# Altium PCB STM8_remote.PcbDoc
Units mil, origin at the board's own origin, x right, y up, seen from the top; angles counter-clockwise.
Board outline 1966 x 1954 mil, 2 copper layers (Top Layer, Bottom Layer); 54 components, 52 nets, 170 pads, 53 vias.
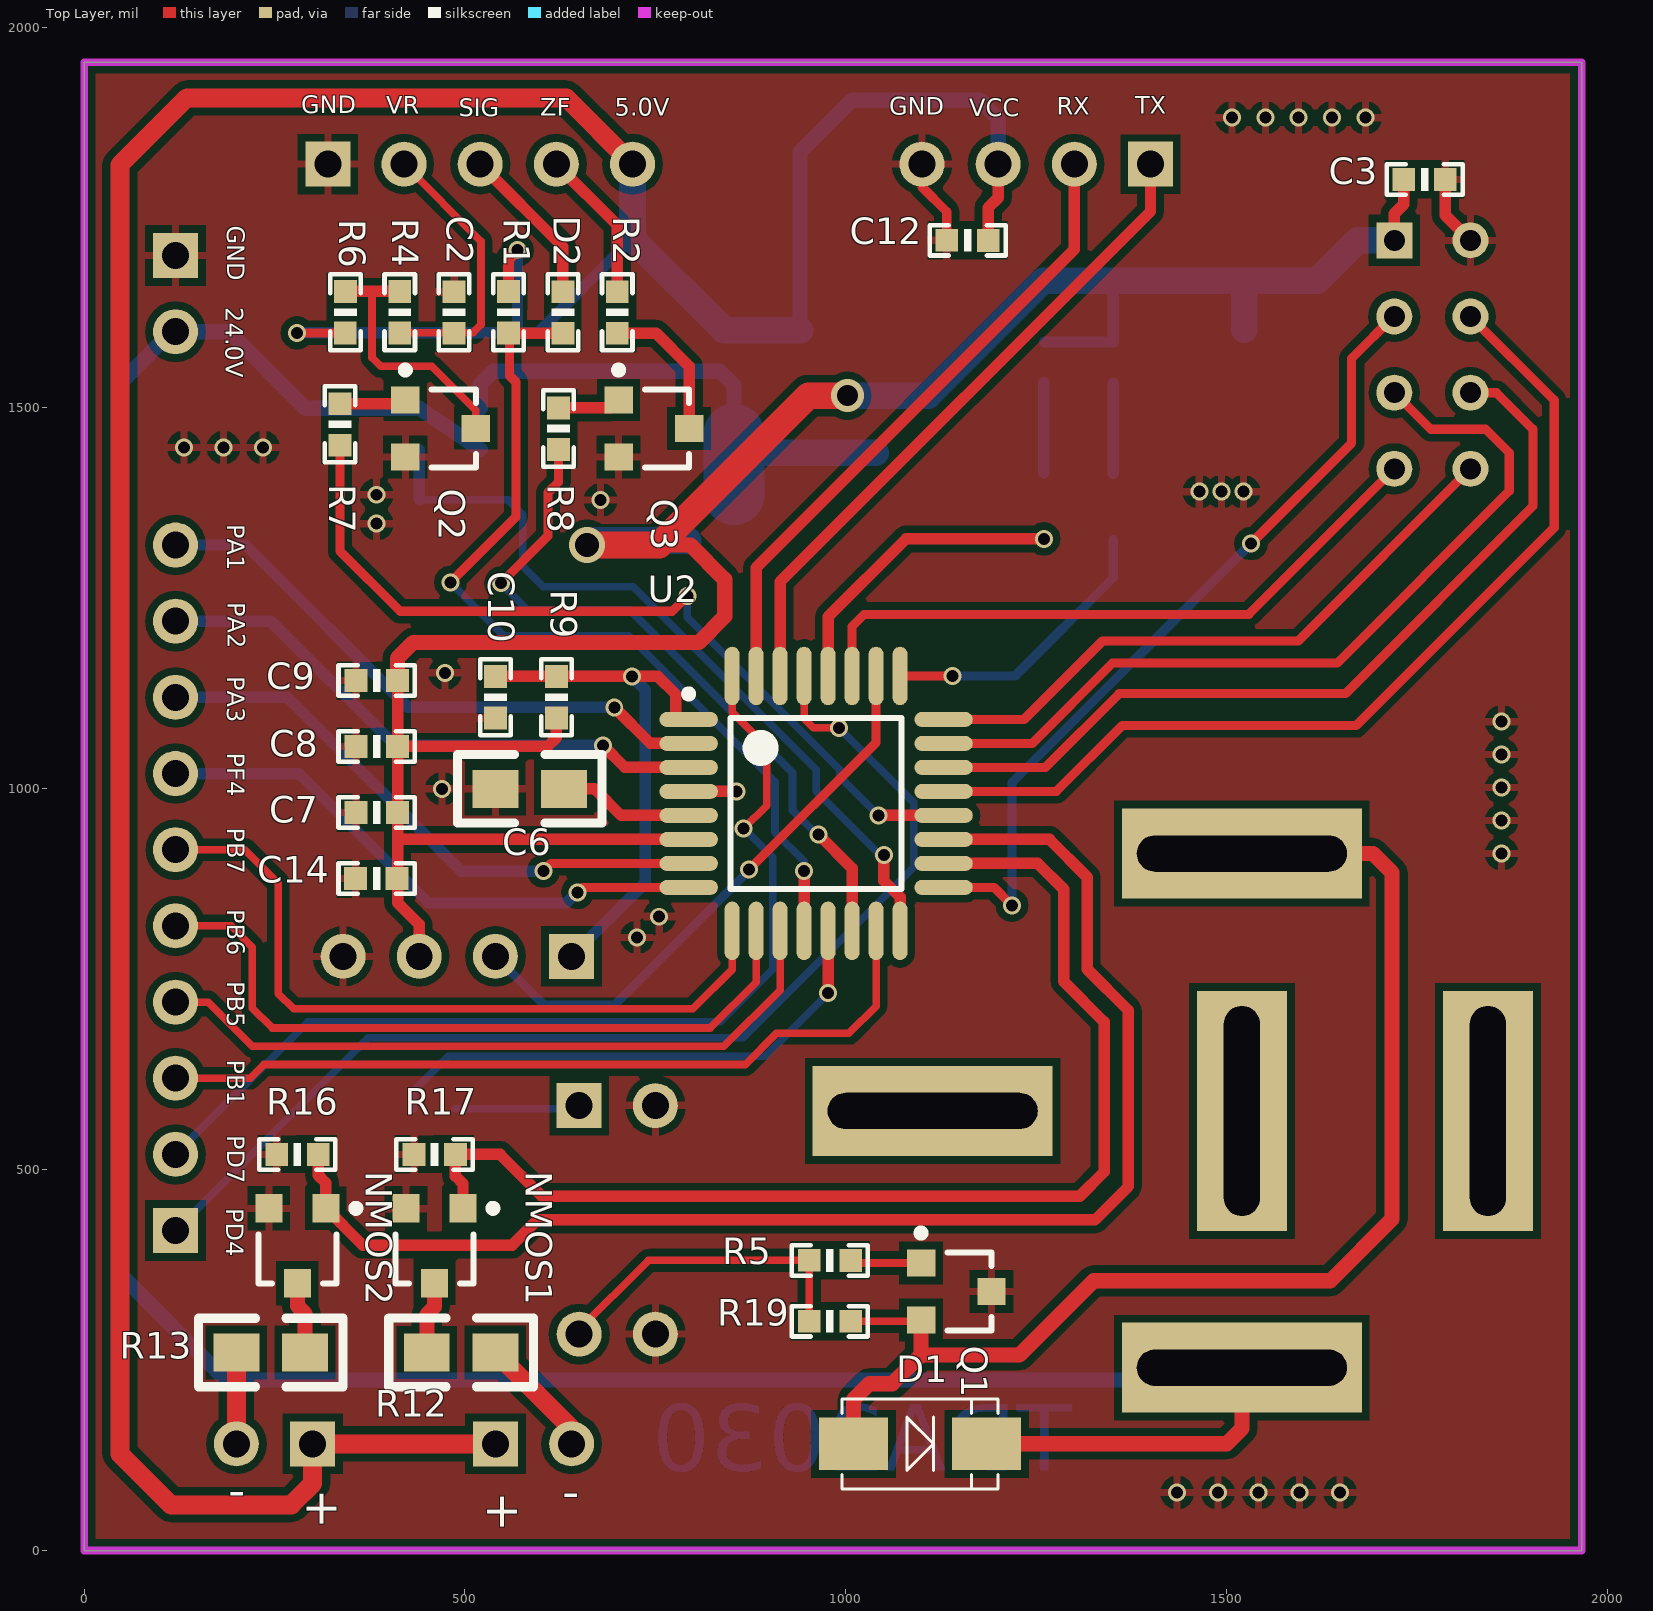
[diagram p0: Top Layer view]
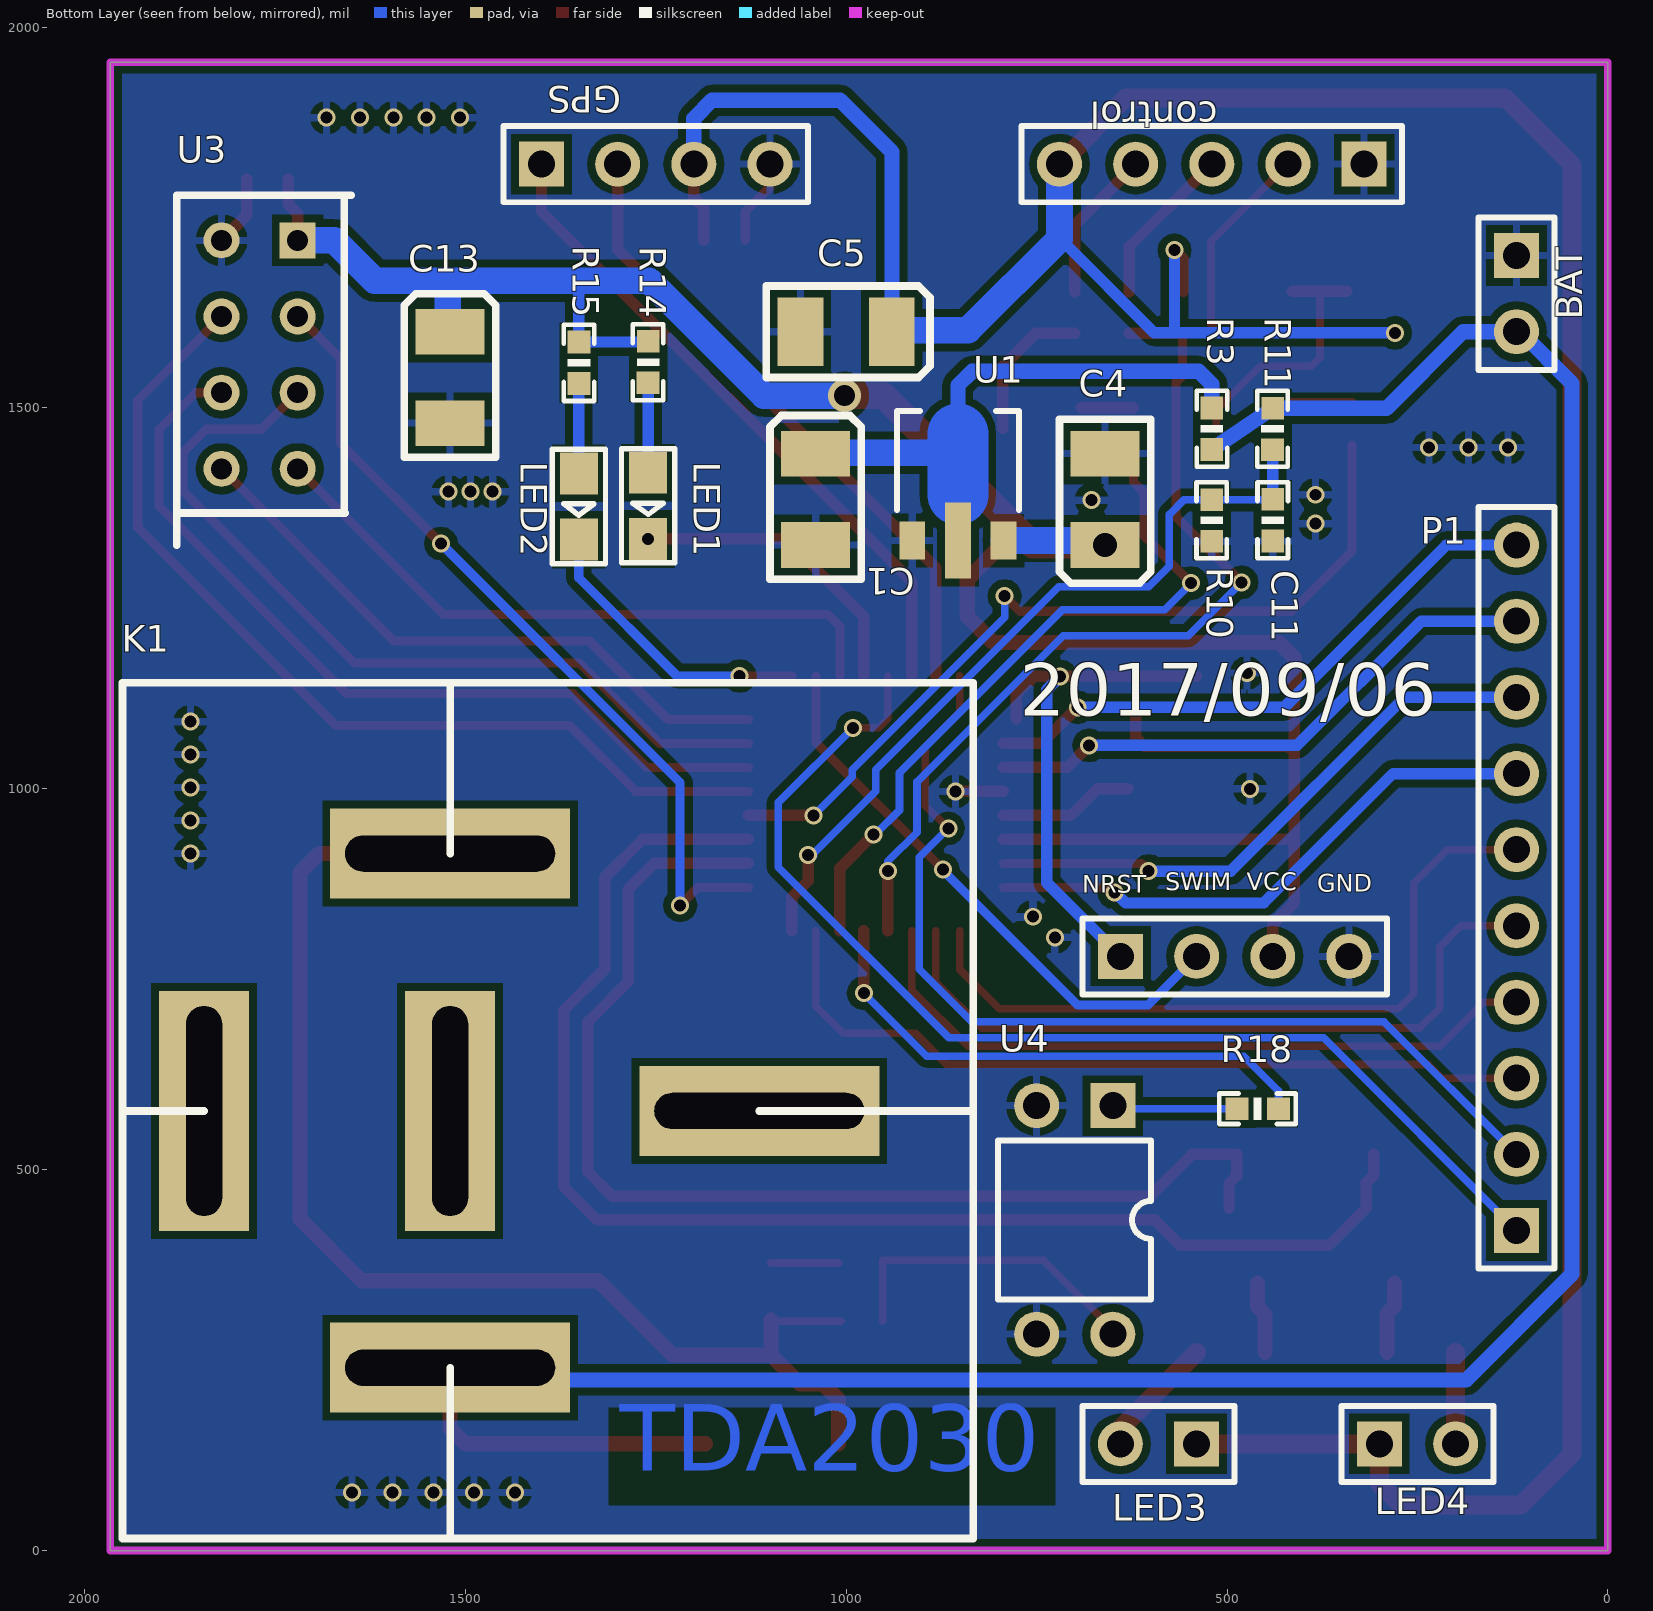
[diagram p1: Bottom Layer view, seen from below]

## Layer stack, top to bottom
Top Layer: signal copper 1.4
Dielectric: core 12.6, FR-4, Dk 4.8
Bottom Layer: signal copper 1.4

## Board outline
0,0 1966,0 1966,1954 0,1954

## Design rules (kind name [scope] priority, off if disabled: settings)
Clearance [All] p1: gap=10
ComponentClearance [All] p1: gap=10 collisioncheckmode=3 verticalgap=10
PolygonConnect [All] p1: connectstyle=Relief reliefconductorwidth=10 reliefentries=4 polygonreliefangle="90 Angle"
RoutingLayers [All] p1: top layer_v5=TRUE bottom layer_v5=FALSE
RoutingVias [All] p1: holewidth=28 width=50 viastyle="Through Hole" minholewidth=28 minwidth=50 maxholewidth=28 maxwidth=50
SolderMaskExpansion [All] p1: expansion=4
TestPointUsage [All] p1: valid=0 allowmultiple=FALSE
Testpoint [All] p1: side=15 testpointundercomponent=TRUE minsize=40 maxsize=100 preferedsize=60 minholesize=0 maxholesize=40 preferedholesize=32 testpointgrid=1 style=1023 order=0123456789
Width [All] p1: maxlimit=80 minlimit=10 preferedwidth=12
17 further rules are at their usual default settings.

## Components (designator, comment, footprint, x,y, rotation, side; value= is the part's Value field where it differs from the comment)
BAT "Header 2" HDR1X2 120,1700 r270 bottom
C1 "10uf" "tantalum capacitors" 1040,1320 r90 bottom
C2 "1uf" 0603P 485.84,1625.5 r270 top
C3 "104" 0603P 1760,1800 r180 top
C4 "10uf" "tantalum capacitors" 660,1440 r270 bottom
C5 "10uf" "tantalum capacitors" 1060,1600 r180 bottom
C6 "10uf" 0805 540,1000 r0 top
C7 "104" 0603P 384,968.75 r0 top
C8 "104" 0603P 384,1055.38 r0 top
C9 "104" 0603P 384,1142 r0 top
C10 "104" 0603P 540,1120 r90 top
C11 "104" 0603P 440.06,1352.5 r90 bottom
C12 "104" 0603P 1160,1720 r180 top
C13 "10uf" "tantalum capacitors" 1520,1480 r90 bottom
C14 "104" 0603P 384,882 r180 top
control "Header 5" HDR1X5 320,1820 r0 bottom
D1 "1N4007" DIODE_3*5.3 1100,140 r0 top
D2 "1N4148" 0603P 628.61,1625.5 r270 top
GPS "Header 4" HDR1X4 1400,1820 r180 bottom
K1 "Relay-SPDT" RELAY 1520,240 r180 bottom
LED1 "LED1" SMDLED 1260,1415.06 r270 bottom
LED2 "LED1" SMDLED 1350.94,1414.13 r270 bottom
LED3 "Header 2" HDR1X2 540,140 r0 bottom
LED4 "Header 2" HDR1X2 300,140 r180 bottom
NMOS1 "SI2301" SO-G3/C2.5 460,400 r180 top
NMOS2 "SI2301" SO-G3/C2.5 280,400 r180 top
P1 "Header 10" HDR1X10 120,420 r90 bottom
Q1 "S8550" SOT-23R 1140,340 r270 top
Q2 "S8050" SOT-23R 463,1473 r270 top
Q3 "S8050" SOT-23R 743,1473 r270 top
R1 "1K" 0603P 557.1,1625.5 r90 top
R2 "470Ω" 0603P 700,1625.5 r270 top
R3 "200Ω" 0603P 520.06,1472.5 r90 bottom
R4 "10K" 0603P 414.32,1625.5 r90 top
R5 "1K" 0603P 979,381 r0 top
R6 "2.2K" 0603P 342.94,1625.5 r90 top
R7 "1K" 0603P 335.94,1478.5 r270 top
R8 "1K" 0603P 623,1473 r270 top
R9 "10K" 0603P 620,1120 r90 top
R10 "10K" 0603P 520.06,1352.5 r270 bottom
R11 "50K" 0603P 440.06,1472.5 r270 bottom
R12 "56Ω" 0805 540,260 r180 top
R13 "56Ω" 0805 200,260 r0 top
R14 "1K" 0603P 1260,1560 r90 bottom
R15 "1K" 0603P 1350.94,1559.06 r90 bottom
R16 "1K" 0603P 280,520 r0 top
R17 "1K" 0603P 460,520 r0 top
R18 "1K" 0603P 460,580 r180 bottom
R19 "10K" 0603P 979,301 r0 top
SWIM "Header 4" HDR1X4 640,780 r180 bottom
U1 "HT7533" SOT-89 913.25,1326 r180 bottom
U2 "STM8S103K3T6C" TQFP32 961,980.76 r0 top
U3 "NRF24L01" NRF24L01 1820,1720 r0 bottom
U4 "Optoisolator1" DIP-4 700,434 r0 bottom

## Footprints (in the part's own frame and the unit in brackets; to place one, negate y for a bottom-side part, rotate by r counter-clockwise, add the part's x,y. Pads: shape width x height; smd on the part's side, far side on the other; paste and mask are expansions set on the pad)
0603P [mil]
  rect 30x30 smd: 1(-27,0) 2(27.5,-0.06)
  silkscreen extent -50,-20 50,20
0805 [mil]
  rect 60x50 smd: 1(0,-0.06) 2(90,-0.06)
  silkscreen extent -50,-45 140,45
DIODE_3*5.3 [mm]
  rect 2.3x1.75 smd: 1(-2.286,0) 2(2.159,0)
  silkscreen extent -2.67,-1.5 2.54,1.5
DIP-4 [mm] "DIP; 4 Leads; Row Spacing 7.62 mm; Pitch 2.54 mm"
  rect 1.5x1.5 hole 0.9: 1(-1.27,-3.81)
  round 1.5 hole 0.9: 2(1.27,-3.81) 3(1.27,3.81) 4(-1.27,3.81)
  silkscreen extent -2.55,-2.65 2.55,2.65
HDR1X2 [mm] "Connector; Header; 2 Position"
  rect 1.5x1.5 hole 0.9: 1(0,0)
  round 1.5 hole 0.9: 2(2.54,0)
  silkscreen extent -1.27,-1.27 3.81,1.27
HDR1X4 [mm]
  rect 1.5x1.5 hole 0.9: 1(0,0)
  round 1.5 hole 0.9: 2(2.54,0) 3(5.08,0) 4(7.62,0)
  silkscreen extent -1.27,-1.27 8.89,1.27
HDR1X5 [mm] "Connector; Header; 5 Position"
  rect 1.5x1.5 hole 0.9: 1(0,0)
  round 1.5 hole 0.9: 2(2.54,0) 3(5.08,0) 4(7.62,0) 5(10.16,0)
  silkscreen extent -1.27,-1.27 11.43,1.27
HDR1X10 [mm] "Connector; Header; 10 Position"
  rect 1.5x1.5 hole 0.9: 1(0,0)
  round 1.5 hole 0.9: 2(2.54,0) 3(5.08,0) 4(7.62,0) 5(10.16,0) 6(12.7,0) 7(15.24,0) 8(17.78,0) 9(20.32,0) 10(22.86,0)
  silkscreen extent -1.27,-1.27 24.13,1.27
NRF24L01 [mm]
  round 1.2 hole 0.7: 1(0,0) 3(0,2.54) 4(-2.54,2.54) 5(0,5.08) 6(-2.54,5.08) 7(0,7.62) 8(-2.54,7.62)
  rect 1.2x1.2 hole 0.7: 2(-2.54,0)
  silkscreen extent -4.32,-1.5 1.5,10.16
RELAY [mm]
  rect 8x3 hole 1.2 slot 7 at 0 deg: 1(0,0) 2(0,17.145) 5(10.312,8.56)
  rect 3x8 hole 1.2 slot 7 at 90 deg: 3(0,8.56) 4(-8.204,8.56)
  silkscreen extent -10.92,-5.7 17.45,22.84
SMDLED [mm]
  rect 1.4x1.27 smd: 1(0.001,-0.002) 2(2.211,-0.002)
  silkscreen extent -0.8,-0.89 3.01,0.89
SO-G3/C2.5 [mm]
  rect 0.9x0.95 smd: 1(-0.95,-1.25) 2(0.95,-1.25) 3(0,1.25)
  silkscreen extent -2.08,-1.37 1.3,1.25
SOT-23R [mm]
  rect 0.9x0.95 smd: 1(0.95,-1.048) 2(-0.95,-1.048) 3(0,1.302)
  silkscreen extent -2.07,-1.17 1.3,1.3
SOT-89 [mil]
  rect 34x50 smd: 1(0,0) 3(120,0)
  rect 34x100 smd: 2(60,0)
  Top Layer lines w80: 60,60 60,112 60,121 60,140
  silkscreen extent -20,40 140,170
"tantalum capacitors" [mil]
  rect 60x90.55 smd: 1(0,0) 2(120,0)
  silkscreen extent -45,-60 170,60
TQFP32 [mm] "Thin QFP, 32-Leads, Body 7x7mm, Pitch 0.8mm, IPC Low Density"
  oval 1.95x0.5 smd: 1(-4.25,2.8) 2(-4.25,2) 3(-4.25,1.2) 4(-4.25,0.4) 5(-4.25,-0.4) 6(-4.25,-1.2) 7(-4.25,-2) 8(-4.25,-2.8) 17(4.25,-2.8) 18(4.25,-2) 19(4.25,-1.2) 20(4.25,-0.4) 21(4.25,0.4) 22(4.25,1.2) 23(4.25,2) 24(4.25,2.8)
  oval 0.5x1.95 smd: 9(-2.8,-4.25) 10(-2,-4.25) 11(-1.2,-4.25) 12(-0.4,-4.25) 13(0.4,-4.25) 14(1.2,-4.25) 15(2,-4.25) 16(2.8,-4.25) 25(2.8,4.25) 26(2,4.25) 27(1.2,4.25) 28(0.4,4.25) 29(-0.4,4.25) 30(-1.2,4.25) 31(-2,4.25) 32(-2.8,4.25)
  silkscreen extent -4.37,-2.85 2.85,3.77, body extent -3.5,-3.5 3.5,3.5, height 1.2

## Part data
BAT LED3 LED4: "Header, 2-Pin"
C1 C2 C3 C4 C5 C6 C7 C8 C9 C10 C11 C12 C13 C14: library part C
control: "Header, 5-Pin"
D1 D2: library part D
GPS SWIM: "Header, 4-Pin"
K1: "Single-Pole Dual-Throw Relay"
LED1 LED2: library part LED2, "Typical RED, GREEN, YELLOW, AMBER GaAs LED"
NMOS1 NMOS2: library part MOS-P, "IRLML6401/SI2301"
P1: "Header, 10-Pin"
Q1 Q2 Q3: library part NPN, "8050/BCW846/BCW847"
R1 R2 R3 R4 R5 R6 R7 R8 R9 R10 R11 R12 R13 R14 R15 R16 R17 R18 R19: library part R
U1: library part HT75xx
U2: library part STM8S103K3T6, "ST 8-bit  Microcontroller"
U4: "4-Pin Phototransistor Optocoupler"

## Via types
v1: diameter 23.62, hole 15.75, Top Layer to Bottom Layer, 51 vias
v2: diameter 43.31, hole 27.56, Top Layer to Bottom Layer, 1 vias
v3: diameter 47.24, hole 31.5, Top Layer to Bottom Layer, 1 vias

## Nets (pads, with @x,y where several pads share a name; then routed paths per layer and width w, separated by ;. In a path a pad name is that pad's centre, name@x,y a point inside that pad or via, vN(x,y) a via of type N, cw(c..) or ccw(c..) an arc to the next point about the centre after c; other vN are vias at no path point)
BAT_ADC: C11.2 R10.1 R11.2 U2.16 | length 1032.8
  Top Layer w15: v1(1050,913) 1050,879 1071.24,857.76 U2.16
  Bottom Layer w10: C11.2@440.76,1379.5 556.5,1379.5 576,1360 576,1292 603,1265 721,1265 961,1025 961,997 v1@1045,913
  Bottom Layer w15: R11.2 440.13,1380.13 C11.2@440.76,1379.5 ; v1@1045,913 v1(1050,913)
GND: BAT.1 C1.1 C2.1 C3.1 C4.1 C5.1 C6.1 C7.1 C8.1 C9.1 C10.1 C11.1 C12.2 C13.1 C14.2 control.1 GPS.4 NMOS1.2 NMOS2.2 Q1.3 Q2.1 Q3.1 R10.2 R16.1 R17.1 SWIM.4 U1.1 U2.4 U3.1 U4.2 U4.3 | length 282.9
  Top Layer w12: GPS.4 1100,1790 1132.5,1757.5 C12.2
  Top Layer w15: U2.4 v1(856.5,996.5) ; C3.1 1787,1753 U3.1 U3.1@1820,1733
  other v1: 1435,76 1488.5,76 1542,76 1595.5,76 1649,76 726,805 755,832 1861,915 1861,958.25 470,1000 1861,1001.5 1861,1044.75 1861,1088 474,1152 384,1348 678,1379 384,1386 1464,1390 1493,1390 1522,1390 131,1448 183,1448 235,1448 1507,1881 1550.75,1881 1594.5,1881 1638.25,1881 1682,1881
GPS_RX: GPS.2 U2.31 | length 845
  Top Layer w15: U2.31 882.26,1290.26 1300,1708 GPS.2
GPS_TX: GPS.1 U2.30 | length 873.3
  Top Layer w15: U2.30 913.76,1271.76 1400,1758 GPS.1
LED1: LED2.2 U2.25 | length 383.3
  Top Layer w12: U2.25 v1(1139.92,1148.08)
  Bottom Layer w12: v1(1139.92,1148.08) 1222.08,1148.08 1351,1277 LED2.2
LED2: LED1.2 U2.28 | length 403.3
  Top Layer w15: U2.28 976.75,1225.75 1079.02,1328.02 v1(1260.06,1328.02)
LED_L: NMOS2.1 R16.2 U2.19 | length 1817.8
  Top Layer w15: R16.2 307.5,492.5 317.4,482.6 NMOS2.1 365.61,401 562,401 595,434 1327,434 1371,478 1371,709 1317,763 1317,884 1267.49,933.51 U2.19
LED_R: NMOS1.1 R17.2 U2.18 | length 1527.1
  Top Layer w15: NMOS1.1 497.4,481.6 487.5,491.5 R17.2 546.06,519.94 601,465 1307,465 1339,497 1339,694 1286,747 1286,868 1251.98,902.02 U2.18
NetC1_2: C1.2 R3.2 U1.2 | length 657.6
  Bottom Layer w20: R3.2 520,1531 537,1548 835,1548 853.25,1529.75 853.25,1438
  Bottom Layer w35: 853.25,1438 856.25,1441 C1.2@1039,1441
NetC2_2: C2.2 control.2 R4.1 | length 363.9
  Top Layer w10: R4.1 510.5,1598.5 521,1609 521,1719 control.2
NetC6_2: C6.2 U2.5 | length 178.1
  Top Layer w15: C6.2 670.06,999.94 704.99,965.01 U2.5
Netcontrol_3: control.3 D2.1 | length 212.5
  Top Layer w15: control.3 628.61,1711.39 D2.1
Netcontrol_4: control.4 R2.1 | length 200.6
  Top Layer w15: control.4 700,1740 R2.1
NetD1_1: D1.1 K1.2 Q1.1 R19.2 | length 1662
  Top Layer w10: R19.2 Q1.1@1097.08,300.94
  Top Layer w20: D1.1 1010,198.06 1030.94,219 1061,219 1098.74,256.74 ; Q1.1 1098.74,256.74 ; K1.2 1692,915 1717,890 1717,435 1636,354 1325,354 1227.74,256.74 1098.74,256.74
NetLED1_1: LED1.1 R14.1 | length 117.9
  Bottom Layer w15: LED1.1@1260,1415.06 R14.1
NetLED2_1: LED2.1 R15.1 | length 117.9
  Bottom Layer w15: LED2.1@1350.94,1414.13 R15.1
NetLED3_2: LED3.2 R12.1 | length 161.5
  Top Layer w25: R12.1 640,160.06 LED3.2
NetLED4_2: LED4.2 R13.1 | length 119.9
  Top Layer w25: LED4.2 R13.1
NetNMOS1_3: NMOS1.3 R12.2 | length 94.9
  Top Layer w20: R12.2 450,310 460,320 NMOS1.3
NetNMOS2_3: NMOS2.3 R13.2 | length 95
  Top Layer w20: NMOS2.3 280,321 290,311 R13.2
NetQ1_2: Q1.2 R5.2 | length 88.7
  Top Layer w10: R5.2@1010.03,377.4 Q1.2
NetQ2_2: Q2.2 R7.1 | length 80.9
  Top Layer w15: R7.1 Q2.2@416.84,1505.5
NetQ2_3: Q2.3 R4.2 R6.2 | length 347.1
  Top Layer w10: 378,1653 378,1566 389.34,1554.66 456.34,1554.66 514.26,1496.74 Q2.3
  Top Layer w15: R6.2 R4.2
NetQ3_2: Q3.2 R8.1 | length 68.3
  Top Layer w15: R8.1 Q3.2@691.34,1500
NetQ3_3: Q3.3 R2.2 | length 194
  Top Layer w15: R2.2 751,1598 794.26,1554.74 Q3.3
NetR5_1: R5.1 R19.1 U4.4 | length 423.9
  Top Layer w10: U4.4@647,287 741,381 R5.1 R19.1
NetR18_1: R18.1 U4.1 | length 163
  Bottom Layer w10: R18.1 U4.1@650,580
NRF_CE: U2.21 U3.3 | length 1267.8
  Top Layer w12: U2.21 1276.5,996.5 1363,1083 1670,1083 1930,1343 1930,1510 U3.3
NRF_CSN: U2.17 U3.4 | length 1080.9
  Top Layer w12: U2.17 1194.48,870.52 v1(1218,847) ; v1(1532,1322) 1664,1454 1664,1565 U3.4@1719,1620
  Top Layer w15: U3.4@1719,1620 U3.4
  Bottom Layer w12: v1(1218,847) 1218,1008 v1(1532,1322)
NRF_IRQ: U2.27 U3.8 | length 862.6
  Top Layer w12: U2.27 1008.24,1213.24 1024,1229 1529,1229 U3.8
NRF_MISO: U2.24 U3.7 | length 828
  Top Layer w12: U2.24 1233.99,1090.99 1337,1194 1594,1194 U3.7
NRF_MOSI: U2.23 U3.6 | length 1113.7
  Top Layer w12: U2.23 1244.5,1059.5 1350,1165 1645,1165 1871,1391 1871,1441 1840,1472 1768,1472 U3.6
NRF_SCK: U2.22 U3.5 | length 1118.6
  Top Layer w12: U2.22 1262,1028 1359,1125 1656,1125 1902,1371 1902,1472 1854,1520 U3.5
NRST: C10.2 R9.2 SWIM.1 U2.1 | length 693.6
  Top Layer w15: C10.2 753.09,1147.5 777,1123.59 U2.1@777,1092 ; R9.2 R9.2@620.34,1147.78
  Bottom Layer w15: SWIM.1 736.59,876.59 736.59,1129.91 v1(719,1147.5)
PA1: P1.10 U2.2 | length 781.6
  Top Layer w15: v1(696,1107) 743.5,1059.5 U2.2
  Bottom Layer w15: P1.10 212,1320 425,1107 v1(696,1107)
PA2: P1.9 U2.3 | length 753.2
  Top Layer w15: v1(681,1057) 710,1028 U2.3
  Bottom Layer w15: P1.9 245,1220 408,1057 v1(681,1057)
PA3: P1.8 U2.7 | length 772.3
  Top Layer w12: v1(603,892) 613.02,902.02 U2.7
  Bottom Layer w15: P1.8 267,1120 495,892 v1(603,892)
PB1: P1.3 U2.15 | length 1057.7
  Top Layer w10: P1.3 218,620 236,638 868,638 909,679 1004,679 1039.74,714.74 U2.15
PB5: P1.4 U2.11 | length 926
  Top Layer w10: P1.4 163,720 221,662 840,662 913.76,735.76 U2.11
PB6: P1.5 U2.10 | length 956.8
  Top Layer w10: P1.5 193,820 221,792 221,712 247,686 822,686 882.26,746.26 U2.10
PB7: P1.6 U2.9 | length 974.4
  Top Layer w10: P1.6 211,920 255,876 255,731 275,711 799,711 850.76,762.76 U2.9
PD4: P1.1 U2.29 | length 1497.1
  Top Layer w10: U2.29 945.25,1091.75 957,1080 v1(991,1080)
  Bottom Layer w10: P1.1 373,673 865,673 1089,897 1089,982 v1(991,1080)
PD7: P1.2 U2.32 | length 1316.6
  Top Layer w10: U2.32 850.76,1100.24 896,1055 896,978 v1(866,948)
  Bottom Layer w10: P1.2 294,694 835,694 904,763 904,910 v1(866,948)
PF4: P1.7 U2.8 | length 752.6
  Top Layer w12: v1(648,864) 654.52,870.52 U2.8
  Bottom Layer w15: P1.7 282,1020 452,850 633,850 647,864 v1(648,864)
PWM: R7.2 U2.20 | length 1113.9
  Top Layer w12: R7.2 335.87,1312.13 415,1233 772,1233 v1(792,1253)
  Top Layer w15: v1(1043.01,965.01) U2.20
  Bottom Layer w10: v1(792,1253) 792,1225 992,1025 992,1016 v1@1042.01,965.99
  Bottom Layer w12: v1(1043.01,965.01) v1@1043.01,965.99
  Bottom Layer w15: v1@1042.01,965.99 v1@1043.01,965.99
RELAY: R18.2 U2.13 | length 702.6
  Top Layer w15: v1(976.75,731.75) U2.13
  Bottom Layer w10: R18.2 432.5,603.5 478,649 894,649 v1(976.75,731.75)
SIGNAL: D2.2 R1.1 U2.12 | length 1182.1
  Top Layer w12: v1(481,1271) 567,1357 567,1534 558.5,1542.5 R1.1@558.5,1598
  Top Layer w15: R1.1@558.5,1598 D2.2 ; U2.12 v1(945.25,892)
  Bottom Layer w10: v1(481,1271) 551,1201 715,1201 907,1009 907,943 945.25,904.75 v1(945.25,892)
SWIM: SWIM.2 U2.26 | length 756.7
  Top Layer w12: v1(872.76,893.76) 1039.74,1060.74 U2.26
  Bottom Layer w12: SWIM.2 604,716 696,716 v1@873.26,893.26
VCC3.3: C3.2 C4.2 C7.2 C8.2 C9.2 C13.2 C14.1 R9.1 R14.2 R15.2 SWIM.3 U1.3 U2.6 U3.2 | length 3305.8
  Top Layer w15: C8.2@411.5,1056 609,1056 620,1067 R9.1 ; C8.2@411.5,1061 C8.2@418.5,1054 ; C9.2 411.5,850.5 440,822 SWIM.3 ; 415.49,933.51 U2.6 ; U3.2 1720,1755 1732.5,1767.5 C3.2
  Top Layer w20: C9.2 411.5,1171.5 432,1192 807,1192 841,1226 841,1275 796,1320 755,1320
  Top Layer w35: v3(660,1320) 755,1320 951,1516 v2(1002,1516)
  Bottom Layer w15: R14.2@1260.87,1586.56 R15.2 1350.87,1660
  Bottom Layer w35: C4.2@662,1326 U1.3 ; v2(1002,1516) 1108,1516 1259,1667 1619,1667 1672,1720 U3.2 ; C13.2@1523,1603 1523,1667
VCC5.0: C5.2 C12.1 control.5 GPS.3 LED3.1 LED4.1 R1.2 R6.1 | length 4809.1
  Top Layer w12: v1(279.5,1598.5) R6.1
  Top Layer w15: R1.2 557.16,1695.16 v1(569,1707) ; C12.1 1187,1763 1200,1776 GPS.3
  Top Layer w25: LED3.1 LED4.1 300,88 272,60 114,60 47,127 47,1819 135,1907 633,1907 control.5
  Bottom Layer w15: v1(279.5,1598.5) 595.5,1598.5 718,1721 720,1721 ; 569,1598.5 v1(569,1707)
  Bottom Layer w20: C5.2@940,1602 940,1836 1008,1904 1176,1904 1200,1880 GPS.3
  Bottom Layer w35: control.5 720,1722 840,1602 C5.2@940,1602
VCC24.0: BAT.2 D1.2 K1.1 R3.1 R11.1 | length 3688.9
  Top Layer w20: D1.2 1500,140 1520,160 K1.1
  Bottom Layer w20: R3.1 R11.1 290.5,1499.5 190,1600 115,1600 47,1532 47,363 186,224 1504,224 K1.1
ZF: R8.2 U2.14 | length 934.2
  Top Layer w12: v1(547,1270) 609,1332 609,1389 622.94,1402.94 R8.2
  Top Layer w15: v1(964,940) 1008.24,895.76 U2.14
  Bottom Layer w10: v1(547,1270) 582,1235 716,1235 930,1021 930,972 v1@962,940
  Bottom Layer w15: v1@962,940 v1(964,940)
pads on no net: K1.3 K1.4 K1.5

## Polygon pours and split planes (outlines as drawn)
GND on Top Layer "Top Layer-No Net" (solid, remove dead copper, pour order 1000): 2.75,1955.24 1968.75,1955.24 1968.75,1.24 2.75,1.24
GND on Bottom Layer "Top Layer-No Net" (solid, remove dead copper, pour order 1001): -1.2,1954 1964.8,1954 1964.8,0 -1.2,0

## Keep-outs
Keep-Out Layer:
  the board outline again, w10

## Other copper
Bottom Layer:
  text "TDA2030" at 1297,76 h149.61

## Silkscreen, mask and mechanical layers (free items; w line width, h text height)
Top Overlay:
  text "GND" at 285,1879 h39.37
  text "VR" at 397,1878 h39.37
  text "TX" at 1380,1878 h39.37
  text "GND" at 1057,1877 h39.37
  text "RX" at 1277,1877 h39.37
  text "ZF" at 599,1876 h39.37
  text "5.0V" at 696.44,1876 h39.37
  text "SIG" at 492,1875 h39.37
  text "VCC" at 1162,1875 h39.37
  text "GND" at 180,1739 h39.37 r270
  text "24.0V" at 178,1632 h39.37 r270
  text "PA1" at 180,1347 h39.37 r270
  text "PA2" at 181,1245 h39.37 r270
  text "PA3" at 180,1148 h39.37 r270
  text "PF4" at 180,1047 h39.37 r270
  text "PB7" at 180,949 h39.37 r270
  text "PB6" at 180,842 h39.37 r270
  text "PB5" at 180,747 h39.37 r270
  text "PB1" at 180,644 h39.37 r270
  text "PD7" at 180,545 h39.37 r270
  text "PD4" at 179,449 h39.37 r270
  text "+" at 277,81 h78.74 r270
  text "+" at 514,77 h78.74 r270
  text "-" at 189,43 h78.74
  text "-" at 628,41 h78.74
Bottom Overlay:
  text "2017/09/06" at 772,1073 h118.11
  text "VCC" at 474,859 h39.37
  text "GND" at 381.5,857.06 h39.37
  text "NRST" at 690.26,855.49 h39.37
Bottom Paste:
  text "TDA2030" at 1297,76 h149.61
Bottom Solder:
  text "TDA2030" at 1297,76 h149.61